# Altium PCB btn7960_board.PcbDoc
Units mm, origin at the board's own origin, x right, y up, seen from the top; angles counter-clockwise.
Board outline 152.4 x 101.6 mm, 2 copper layers (Top Layer, Bottom Layer); 43 components, 42 nets, 141 pads, 32 vias.
Unrouted connection lines stored in the file: 3.
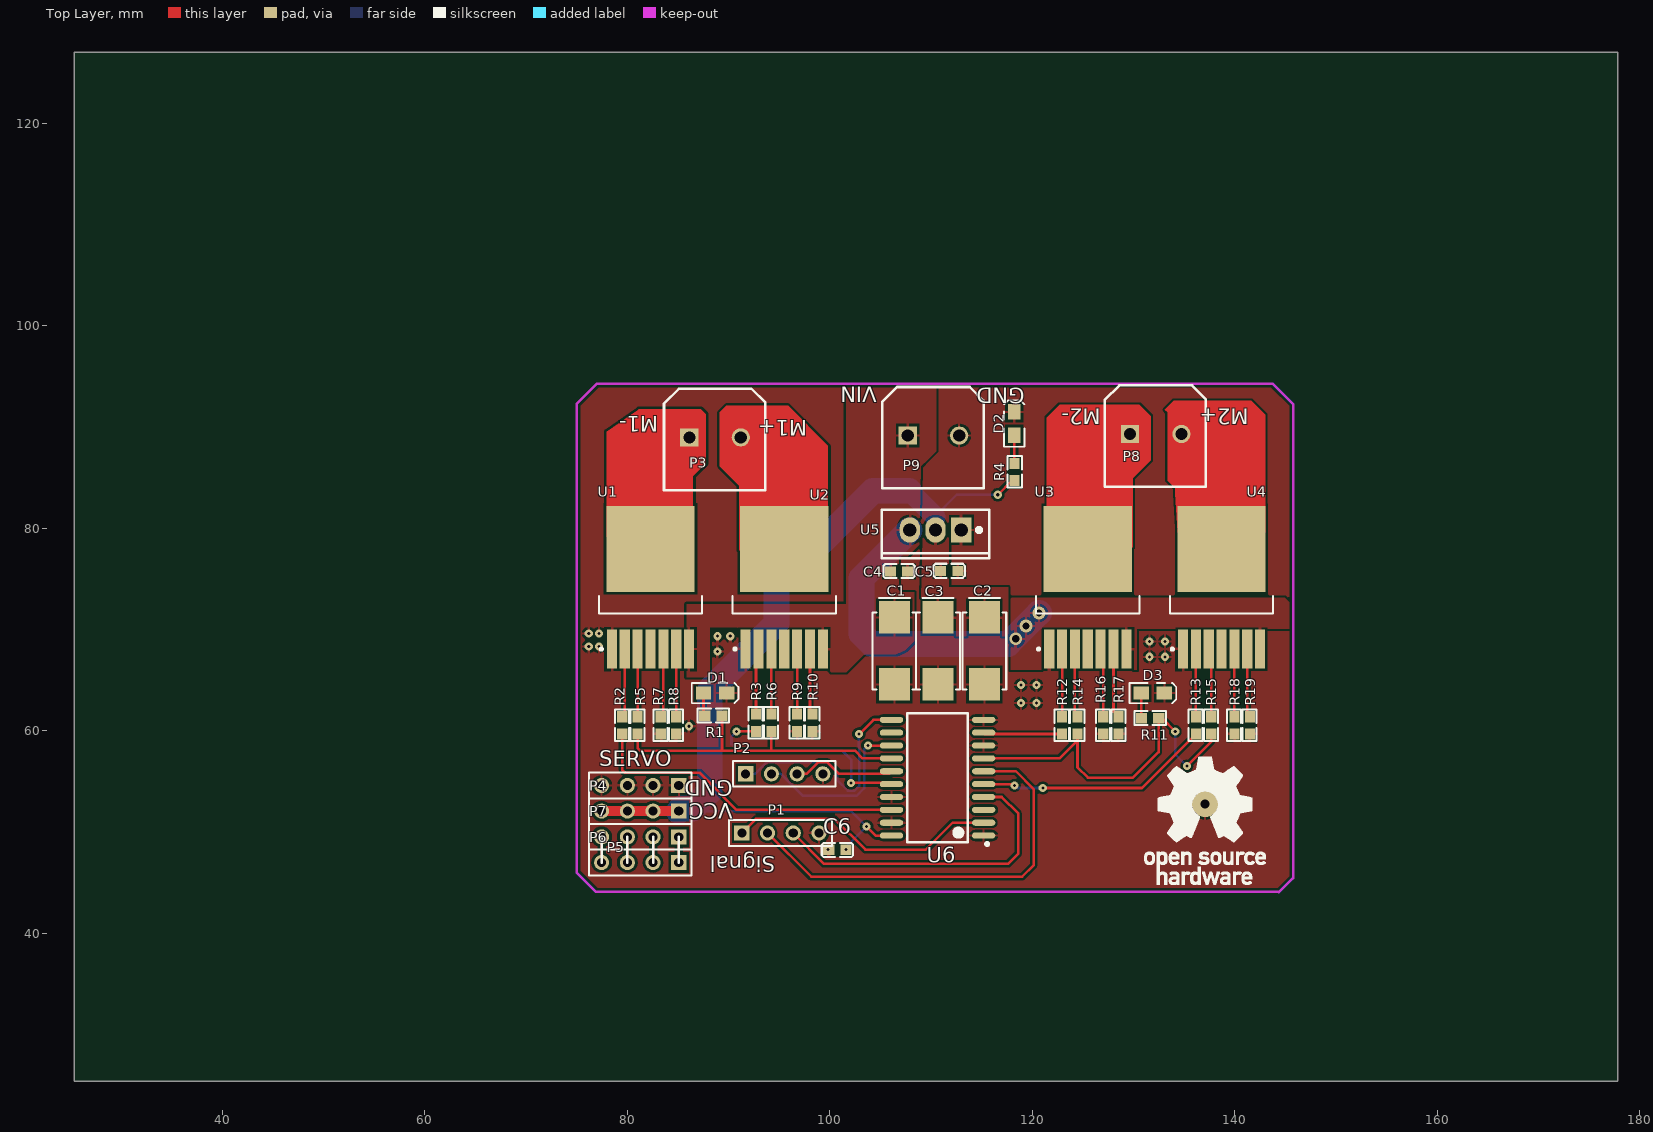
[diagram p0: Top Layer view]
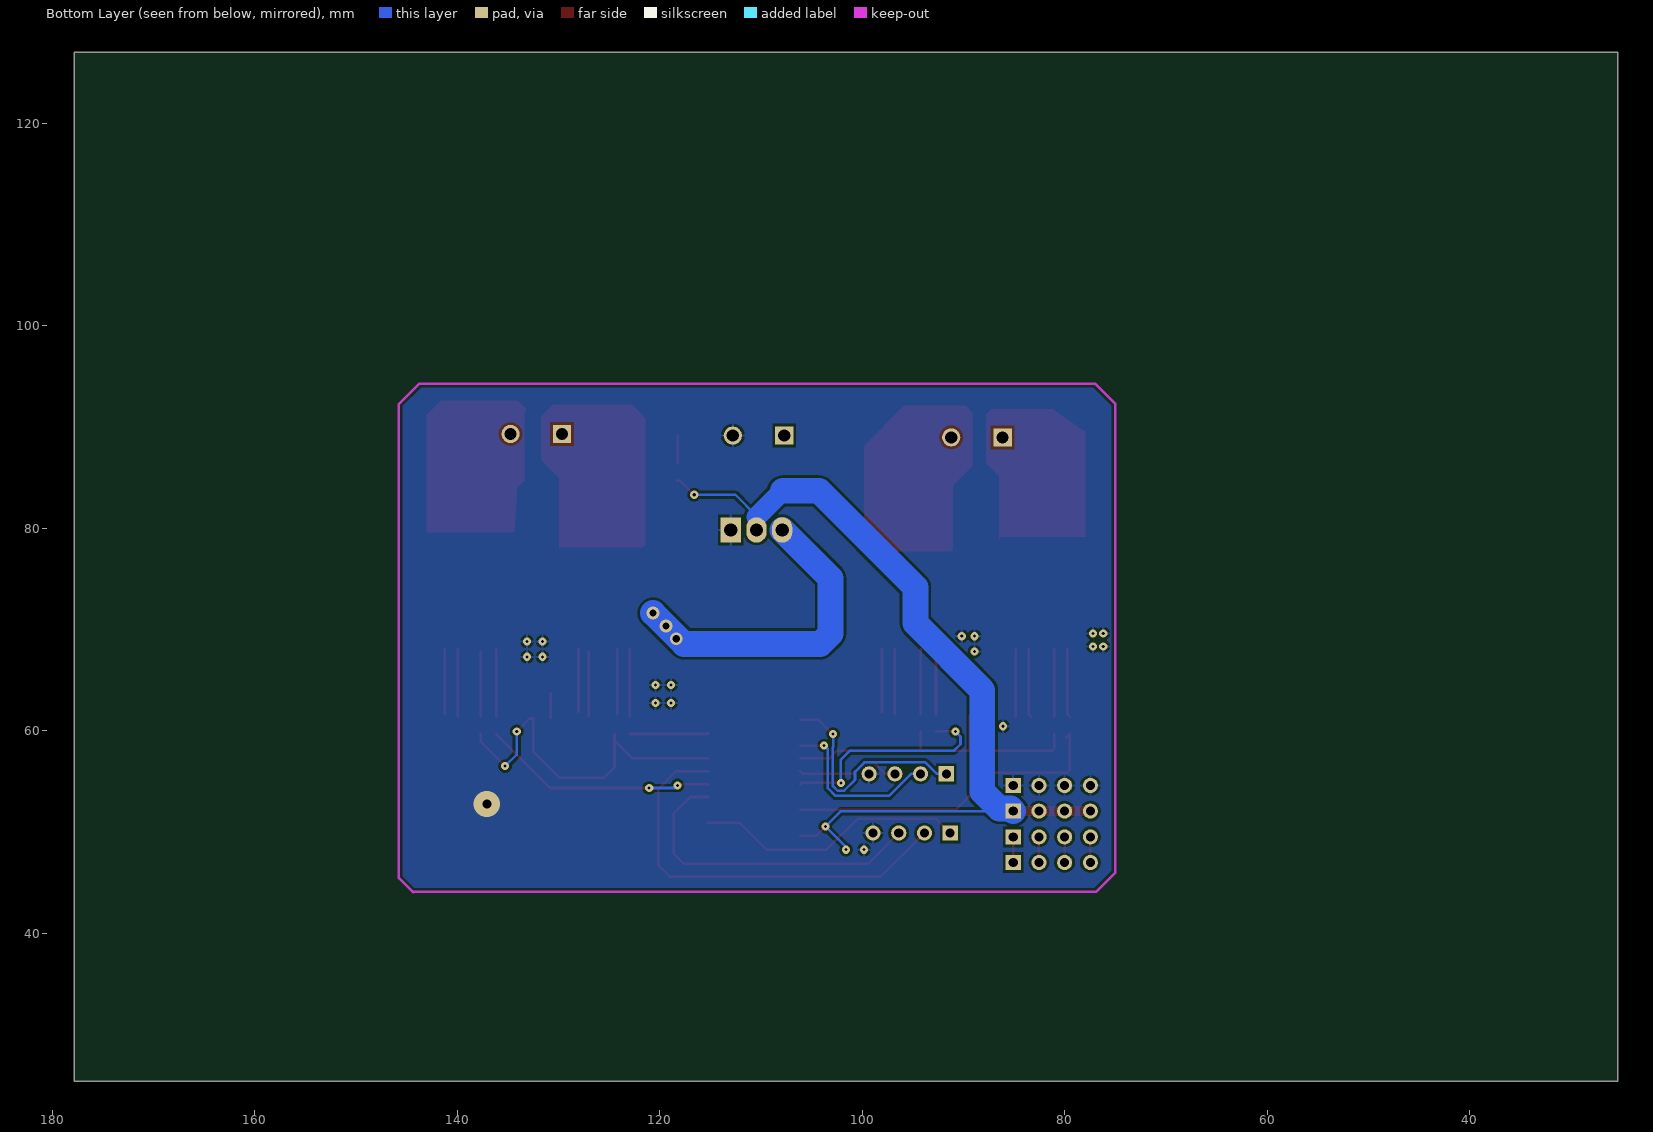
[diagram p1: Bottom Layer view, seen from below]

## Layer stack, top to bottom
Top Solder: solder mask 0.0102, Solder Resist, Dk 3.5
Top Layer: signal copper 0.0356
Dielectric 1: dielectric 0.32, FR-4, Dk 4.8
Bottom Layer: signal copper 0.0356
Bottom Solder: solder mask 0.0102, Solder Resist, Dk 3.5

## Board outline
25.4,25.4 177.8,25.4 177.8,127 25.4,127

## Design rules (kind name [scope] priority, off if disabled: settings)
Clearance [All] p1: gap=0.254
ComponentClearance [All] p1 off: gap=0.254 collisioncheckmode=3 verticalgap=0.254 showdistances=FALSE
MinimumSolderMaskSliver [All] p1: minsoldermaskwidth=0.178
PolygonConnect [All] p1: connectstyle=Relief reliefconductorwidth=0.254 reliefentries=4 polygonreliefangle="90 Angle" airgapwidth=0.254
RoutingVias [All] p1: holewidth=0.3 width=0.8 viastyle="Through Hole" minholewidth=0.3 minwidth=0.8 maxholewidth=2.54 maxwidth=10
SilkToSilkClearance [All] p1 off: silktosilkclearance=0.254
SilkToSolderMaskClearance [IsPad] p1 off: minsilkscreentomaskgap=0.254 clearancetoexposedcopper=TRUE
SolderMaskExpansion [All] p1: expansion=0.102
Width [All] p1: maxlimit=2.54 minlimit=0.178 preferedwidth=0.254
26 further rules are at their usual default settings.

## Components (designator, comment, footprint, x,y, rotation, side; value= is the part's Value field where it differs from the comment)
C1 "Cap" CAP-7343 106.375,67.894 r270 top
C2 "Cap" CAP-7343 115.265,67.894 r270 top
C3 "Cap" CAP-7343 110.693,67.894 r270 top
C4 "cap smd" CAP-0603 105.994,75.743 r0 top
C5 "cap smd" CAP-0603 110.947,75.768 r0 top
C6 "cap smd" CAP-0603 101.6,48.26 r180 top
D1 "LED2" D2012[0805] 88.671,63.729 r0 top
D2 "LED2" D2012[0805] 118.212,90.348 r90 top
D3 "LED2" D2012[0805] 131.902,63.729 r0 top
P1 "M1Control" HDR1X4 91.313,49.911 r0 top
P2 "M2Control" HDR1X4 91.694,55.753 r0 top
P3 "Header 2" WJ500V-5.08-2P 86.131,88.976 r0 top
P4 "VCC-5" HDR1X4 85.09,52.07 r180 top
P5 "GND" HDR1X4 85.09,54.61 r180 top
P6 "ServoSignal" HDR1X4 85.09,46.99 r180 top
P7 "ServoSignalIn" HDR1X4 85.09,49.53 r180 top
P8 "Header 2" WJ500V-5.08-2P 129.642,89.306 r0 top
P9 "Header 2" WJ500V-5.08-2P 107.696,89.154 r0 top
R1 "Res1" RES-0603 87.655,61.493 r0 top
R2 "10K" RES-0603 79.502,59.69 r90 top
R3 "10K" RES-0603 92.71,59.944 r90 top
R4 "RES1" RES-0603 118.237,86.411 r270 top
R5 "10K" RES-0603 81.026,59.69 r90 top
R6 "10K" RES-0603 94.234,59.944 r90 top
R7 "10K" RES-0603 83.312,59.69 r90 top
R8 "10K" RES-0603 84.836,59.69 r90 top
R9 "10K" RES-0603 96.774,59.944 r90 top
R10 "10K" RES-0603 98.298,59.944 r90 top
R11 "Res1" RES-0603 130.785,61.239 r0 top
R12 "10K" RES-0603 122.936,59.69 r90 top
R13 "10K" RES-0603 136.144,59.69 r90 top
R14 "10K" RES-0603 124.46,59.69 r90 top
R15 "10K" RES-0603 137.668,59.69 r90 top
R16 "10K" RES-0603 127,59.69 r90 top
R17 "10K" RES-0603 128.524,59.69 r90 top
R18 "10K" RES-0603 139.954,59.69 r90 top
R19 "10K" RES-0603 141.478,59.69 r90 top
U1 "BTN7970" BTN7970 82.296,74.168 r90 top
U2 "BTN7970" BTN7970 95.504,74.168 r90 top
U3 "BTN7970" BTN7970 125.476,74.168 r90 top
U4 "BTN7970" BTN7970 138.684,74.168 r90 top
U5 "LM1084" LC-TO-220(TO-220-3) 110.439,79.832 r180 top
U6 "74HC244D" LC-SOIC-20_300mil 110.642,55.372 r90 top

## Footprints (in the part's own frame and the unit in brackets; to place one, negate y for a bottom-side part, rotate by r counter-clockwise, add the part's x,y. Pads: shape width x height; smd on the part's side, far side on the other; paste and mask are expansions set on the pad)
BTN7970 [mm] "D2-PAK, 8-Pads, Body 7.82x8.46mm (max), IPC Medium Density"
  rect 3.85x1 smd paste-0.1: 1(-6.1,3.81) 2(-6.1,2.54) 3(-6.1,1.27) 4(-6.1,0) 5(-6.1,-1.27) 6(-6.1,-2.54) 7(-6.1,-3.81)
  rect 8.5x8.7 smd paste-1: 4(3.8,0)
  silkscreen extent -6.22,-5.1 -0.85,5.1, body extent -2.6,-5.1 6.85,5.1, height 4.4
CAP-0603 [mm]
  rect 1.1x1 smd: 1(0,0) 2(1.7,0)
  silkscreen extent -0.71,-0.67 2.39,0.73
CAP-7343 [mm] "钽电容"
  rect 3.2x3.05 smd: 1(-3.302,0) 2(3.302,0)
  silkscreen extent -5.21,-2.16 3.81,2.16, body extent -3.68,-1.91 3.68,1.91, height 2.95
D2012[0805] [mil]
  rect 60x50 smd: 1(-45,0) 2(45,0)
  silkscreen extent -91,-39 91,39, body extent -39,-24 39,24, height 47
HDR1X4 [mm] "Connector; Header; 4 Position"
  rect 1.5x1.5 hole 0.9: 1(0,0)
  round 1.5 hole 0.9: 2(2.54,0) 3(5.08,0) 4(7.62,0)
  silkscreen extent -1.27,-1.27 8.89,1.27
LC-SOIC-20_300mil [mm]
  oval 0.6x2.3 smd: 1(-5.715,-4.55) 2(-4.445,-4.55) 3(-3.175,-4.55) 4(-1.905,-4.55) 5(-0.635,-4.55) 6(0.635,-4.55) 7(1.905,-4.55) 8(3.175,-4.55) 9(4.445,-4.55) 10(5.715,-4.55) 11(5.715,4.55) 12(4.445,4.55) 13(3.175,4.55) 14(1.905,4.55) 15(0.635,4.55) 16(-0.635,4.55) 17(-1.905,4.55) 18(-3.175,4.55) 19(-4.445,4.55) 20(-5.715,4.55)
  silkscreen extent -6.7,-5.05 6.38,3
LC-TO-220(TO-220-3) [mm]
  rect 2x2.5 hole 1.3: 1(-2.54,0)
  oval 2x2.5 hole 1.3: 2(0,0) 3(2.54,0)
  silkscreen extent -5.3,-2 5.3,2.8, body extent -5.08,-1.45 5.08,2.9, height 19.6
RES-0603 [mm] "1/10W"
  rect 1.1x1 smd: 1(0,0) 2(1.7,0)
  silkscreen extent -0.71,-0.67 2.39,0.73
WJ500V-5.08-2P [mm]
  rect 1.8x1.8 hole 1.2: 1(0,0)
  round 1.8 hole 1.2: 2(5.08,0)
  silkscreen extent -2.5,-5.2 7.5,4.8

## Part data
C1 C2 C3: library part "Cap Pol S", "贴片极性电容"
C4 C5 C6: library part CAP, "贴片无极性电容"
D1 D2 D3: "Typical RED, GREEN, YELLOW, AMBER GaAs LED"
P1 P2 P4 P5 P6 P7: library part "Header 4", "Header, 4-Pin"
P3 P8 P9: "Header, 2-Pin"
R1 R11: "Resistor"
R2 R3 R5 R6 R7 R8 R9 R10 R12 R13 R14 R15 R16 R17 R18 R19: library part res1, "Resistor"

## Via types
v1: diameter 0.8, hole 0.3, Top Layer to Bottom Layer, 28 vias
v2: diameter 1.27, hole 0.711, Top Layer to Bottom Layer, 3 vias
v3: diameter 2.6, hole 0.9, Top Layer to Bottom Layer, 1 vias

## Nets (pads, with @x,y where several pads share a name; then routed paths per layer and width w, separated by ;. In a path a pad name is that pad's centre, name@x,y a point inside that pad or via, vN(x,y) a via of type N, cw(c..) or ccw(c..) an arc to the next point about the centre after c; other vN are vias at no path point)
GND: C1.2 C2.2 C3.2 C4.2 C5.2 C6.2 D1.2 D2.2 D3.2 P1.4 P2.4 P5.1 P5.2 P5.3 P5.4 P9.2 R7.1 R8.1 R9.1 R10.1 R16.1 R17.1 R18.1 R19.1 U1.1 U2.1 U3.1 U4.1 U5.1 U6.1 U6.8 U6.10 U6.17 U6.19
  other v1: 99.822,48.26 86.106,60.452 118.872,62.738 120.396,62.738 118.872,64.516 120.396,64.516 131.572,67.31 133.096,67.31 88.9,67.818 76.2,68.326 77.216,68.326 131.572,68.834 133.096,68.834 88.9,69.342 90.17,69.342 76.2,69.596 77.216,69.596
  other v3: 137.058,52.781
MOTOR1+: P3.2 U2.4
MOTOR1-: P3.1 U1.4
MOTOR1_A: R2.1 U6.18 | length 32.3
  Top Layer w0.254: R2.1@79.858,59.334 R2.1 79.502,56.134 79.756,55.88 87.122,55.88 90.805,52.197 U6.18
MOTOR1_A_I: P1.1 U6.2 | length 26.8
  Top Layer w0.254: P1.1 92.71,51.308 100.457,51.308 103.505,48.26 109.474,48.26 112.141,50.927 U6.2
MOTOR1_B: R3.1 U6.16 | length 22.2
  Top Layer w0.254: v1(90.805,59.944) R3.1 ; v1(102.108,54.864) 105.965,54.864 U6.16
  Bottom Layer w0.254: v1(90.805,59.944) 90.297,59.436 90.297,58.674 90.932,58.039 101.219,58.039 102.108,57.15 v1(102.108,54.864)
MOTOR1_B_I: P1.3 U6.4 | length 32
  Top Layer w0.254: P1.3 99.441,46.863 117.602,46.863 118.618,47.879 118.618,51.816 116.967,53.467 U6.4
MOTOR1_EN: R1.2 R5.1 R6.1 U6.14 | length 32.3
  Top Layer w0.254: R5.1 81.026,58.293 81.28,58.039 89.281,58.039 ; R1.2 89.355,58.092 89.334,58.092 89.281,58.039 ; R6.1 94.234,58.039 ; U6.14 103.251,57.277 102.489,58.039 94.234,58.039 ; 89.281,58.039 94.234,58.039
MOTOR1_EN_I: P1.2 U6.6 | length 41.7
  Top Layer w0.254: P1.2 98.171,45.593 118.999,45.593 120.142,46.736 120.142,54.229 118.364,56.007 U6.6
MOTOR2+: P8.2 U4.4
MOTOR2-: P8.1 U3.4
MOTOR2_A: R12.1 U6.9 | length 7.8
  Top Layer w0.254: U6.9 115.319,59.69 R12.1
MOTOR2_A_I: P2.1 U6.11 | length 22.6
  Top Layer w0.254: v1@102.997,59.817 v1(102.87,59.69) 102.921,59.69 104.318,61.087 U6.11
  Bottom Layer w0.254: P2.1 92.635,55.753 93.766,56.884 99.782,56.884 100.711,55.955 100.711,55.156 101.785,54.083 102.431,54.083 102.889,54.541 102.889,58.398 102.87,58.417 v1(102.87,59.69)
MOTOR2_B: R13.1 U6.5 | length 23.3
  Top Layer w0.254: U6.5 118.11,54.737 v1(118.237,54.61) ; v1(121.031,54.356) 130.81,54.356 R13.1
  Bottom Layer w0.254: v1(118.237,54.61) 118.491,54.356 v1(121.031,54.356)
MOTOR2_B_I: P2.3 U6.15 | length 10.4
  Top Layer w0.254: P2.3 97.715,55.753 98.846,56.884 99.782,56.884 100.913,55.753 105.838,55.753 U6.15
MOTOR2_EN: R11.2 R14.1 R15.1 U6.7 | length 36.3
  Top Layer w0.254: U6.7 122.682,57.277 124.46,59.055 ; R14.1 124.46,59.055 ; v1(134.112,59.944) 132.84,61.216 132.461,61.216 132.461,57.912 129.921,55.372 125.476,55.372 124.46,56.388 124.46,59.055 ; v1(135.255,56.515) 137.668,58.928 R15.1
  Bottom Layer w0.254: v1(134.112,59.944) 134.112,57.658 v1(135.255,56.515)
MOTOR2_EN_I: P2.2 U6.13 | length 17.1
  Top Layer w0.254: v1(103.759,58.547) U6.13
  Bottom Layer w0.254: P2.2 95.175,55.753 97.353,53.575 102.642,53.575 103.397,54.33 103.397,58.185 v1(103.759,58.547)
NetD1_1: D1.1 R1.1 | length 2.1
  Top Layer w0.254: R1.1@87.528,61.62 D1.1
NetD2_1: D2.1 R4.1 | length 2.8
  Top Layer w0.254: R4.1@118.212,86.436 D2.1
NetD3_1: D3.1 R11.1 | length 2.5
  Top Layer w0.254: R11.1@130.759,61.265 D3.1
NetP6_1: P6.1 P7.1 | length 2.5
  Top Layer w0.254: P6.1 P7.1
NetP6_2: P6.2 P7.2 | length 2.5
  Top Layer w0.254: P6.2 P7.2
NetP6_3: P6.3 P7.3 | length 2.5
  Top Layer w0.254: P6.3 P7.3
NetP6_4: P6.4 P7.4 | length 2.5
  Top Layer w0.254: P6.4 P7.4
NetR2_2: R2.2 U1.2 | length 6.8
  Top Layer w0.254: R2.2 79.756,61.644 U1.2
NetR3_2: R3.2 U2.2 | length 6.2
  Top Layer w0.254: R3.2 U2.2@92.71,67.814
NetR5_2: R5.2 U1.3 | length 6.7
  Top Layer w0.254: R5.2 U1.3
NetR6_2: R6.2 U2.3 | length 6.4
  Top Layer w0.254: R6.2 U2.3
NetR7_2: R7.2 U1.5 | length 6.8
  Top Layer w0.254: R7.2 83.566,61.644 U1.5
NetR8_2: R8.2 U1.6 | length 6.7
  Top Layer w0.254: R8.2 U1.6
NetR9_2: R9.2 U2.5 | length 6.4
  Top Layer w0.254: R9.2 U2.5
NetR10_2: R10.2 U2.6 | length 6.2
  Top Layer w0.254: R10.2@98.044,61.898 U2.6
NetR12_2: R12.2 U3.2 | length 6.7
  Top Layer w0.254: R12.2 U3.2
NetR13_2: R13.2 U4.2 | length 6.7
  Top Layer w0.254: R13.2 U4.2
NetR14_2: R14.2 U3.3 | length 6.4
  Top Layer w0.254: R14.2@124.206,61.644 U3.3
NetR15_2: R15.2 U4.3 | length 6.4
  Top Layer w0.254: R15.2 U4.3@137.668,67.814
NetR16_2: R16.2 U3.5 | length 6.4
  Top Layer w0.254: R16.2 U3.5@127,67.814
NetR17_2: R17.2 U3.6 | length 6.2
  Top Layer w0.254: 128.016,61.898 U3.6
NetR18_2: R18.2 U4.5 | length 6.7
  Top Layer w0.254: R18.2 U4.5
NetR19_2: R19.2 U4.6 | length 6.4
  Top Layer w0.254: R19.2@141.224,61.644 U4.6
VCC-5: C2.1 C3.1 C5.1 C6.1 P4.1 P4.2 P4.3 P4.4 R4.2 U5.2 U6.20 | length 89.3
  Top Layer w0.254: v1(103.632,50.546) 104.521,49.657 U6.20 ; v1(116.586,83.312) 117.985,84.711 R4.2
  Top Layer w1: P4.4 P4.3 P4.2 P4.1
  Bottom Layer w0.254: P4.1 102.108,52.07 v1(103.632,50.546) v1@101.6,48.514 ; 110.439,81.112 110.439,81.229 112.522,83.312 v1(116.586,83.312)
  Bottom Layer w2: 107.858,83.693 110.439,81.112
  Bottom Layer w2.54: P4.1 85.356,52.336 86.471,52.336 88.138,54.003 88.138,64.008 94.742,70.612 94.742,74.168 104.267,83.693 107.858,83.693
  other v1: 101.6,48.26
VCC-12: C1.1 C4.1 P9.1 U1.7 U2.7 U3.7 U4.7 U5.3 | length 31.4
  Bottom Layer w2.54: U5.3 103.124,75.057 103.124,69.596 104.14,68.58 117.602,68.58 v2(120.65,71.628)
  other v2: 118.364,69.088 119.38,70.358
pads on no net: U6.3 U6.12

## Polygon pours and split planes (outlines as drawn)
GND on Top Layer "GND" (solid, remove dead copper, pour order 12): 75,44.094 145.745,44.094 145.745,94.285 123.19,94.285 75,94.285
VCC-5 on Top Layer "VCC-5" (solid, remove dead copper, pour order 8): 109.22,81.28 110.49,81.534 111.76,81.28 111.76,77.724 111.76,74.168 111.506,73.914 111.76,74.168 117.602,74.168 117.602,69.342 111.76,69.342 108.966,69.342
VCC-12 on Top Layer "VCC-12" (solid, remove dead copper, pour order 6): 145.923,70.104 145.923,70.612 145.923,72.136 145.288,72.771 144.907,73.152 117.856,73.152 117.856,72.771 117.856,72.136 117.856,68.495 117.856,68.072 117.856,67.056 117.856,66.04 120.904,66.04 120.904,70.104 128.778,70.104 128.778,66.04 130.302,66.04 130.302,70.104 138.176,70.104
VCC-12 on Top Layer "VCC-12" (solid, remove dead copper, pour order 4): 102.743,94.488 110.49,94.488 110.49,87.63 109.601,86.741 108.966,86.106 108.839,78.359 107.696,77.216 106.807,77.216 106.807,74.168 106.68,74.041 107.061,73.66 108.331,73.66 108.331,68.834 107.442,67.945 106.553,67.564 103.378,67.564 101.6,65.786 98.425,65.786 98.425,67.945 98.425,70.104 95.25,70.104 88.138,70.231 88.138,65.278 85.852,65.278 85.852,70.866 85.852,72.517 91.567,72.517 96.901,72.517 98.425,72.517 99.441,72.517 101.6,72.517 101.6,94.488
GND on Bottom Layer "GND" (solid, remove dead copper, pour order 16): 145.745,44.094 145.745,94.285 145.694,94.234 75,94.234 75,66.618 74.93,66.548 74.924,66.542 74.924,44.094

## Keep-outs
Keep-Out Layer:
  lines w0.254: 75,46.031 75,92.272 77.013,94.285 99.949,94.285 143.713,94.285 145.745,92.253 145.745,45.466 144.348,44.069 144.348,44.094 118.534,44.094 106.314,44.094 76.937,44.094 75,46.031

## Other copper
Top Layer:
  region net MOTOR2+: 143.002,79.629 143.002,91.186 141.605,92.583 133.985,92.583 133.096,91.694 133.35,91.44 133.35,84.709 134.112,83.947 134.112,83.439 134.366,79.629
  region net MOTOR2-: 129.921,78.105 129.921,84.963 131.699,86.741 131.699,91.059 130.556,92.202 122.682,92.202 121.412,90.932 121.412,78.359 121.666,78.105
  region net MOTOR1-: 86.487,78.93 86.487,82.042 86.487,85.153 87.757,86.423 87.757,90.106 87.757,91.25 87.249,91.757 81.153,91.757 81.058,91.662 77.978,89.535 77.978,84.391 77.978,79.184 79.502,79.184 86.36,79.184
  region net MOTOR1+: 91.059,77.851 91.186,77.724 99.822,77.724 99.822,88.138 95.885,92.075 89.789,92.075 89.154,91.44 89.154,86.106 91.059,84.201

## Silkscreen, mask and mechanical layers (free items; w line width, h text height)
Top Overlay:
  drawing of 2061 lines, arcs and shapes, not listed
  text "VIN" at 104.648,93.98 h1.52 r180
  text "GND" at 119.253,93.853 h1.52 r180
  text "M2-" at 126.746,91.821 h1.52 r180
  text "M2+" at 141.351,91.821 h1.52 r180
  text "M1-" at 83.058,91.059 h1.5 r180
  text "M1+" at 97.79,90.678 h1.5 r180
  text "SERVO" at 77.216,56.515 h1.52
  text "GND" at 90.424,55.118 h1.52 r180
  text "VCC" at 90.424,52.832 h1.52 r180
  text "Signal" at 94.615,47.625 h1.52 r180